# Altium PCB Arduino NANO V3_PCB_2022-06-21.pcbdoc
Units mil, origin at the board's own origin, x right, y up, seen from the top; angles counter-clockwise.
Board outline 3510 x 3525 mil, 2 copper layers (Top Layer, Bottom Layer); 31 components, 48 nets, 148 pads, 30 vias.
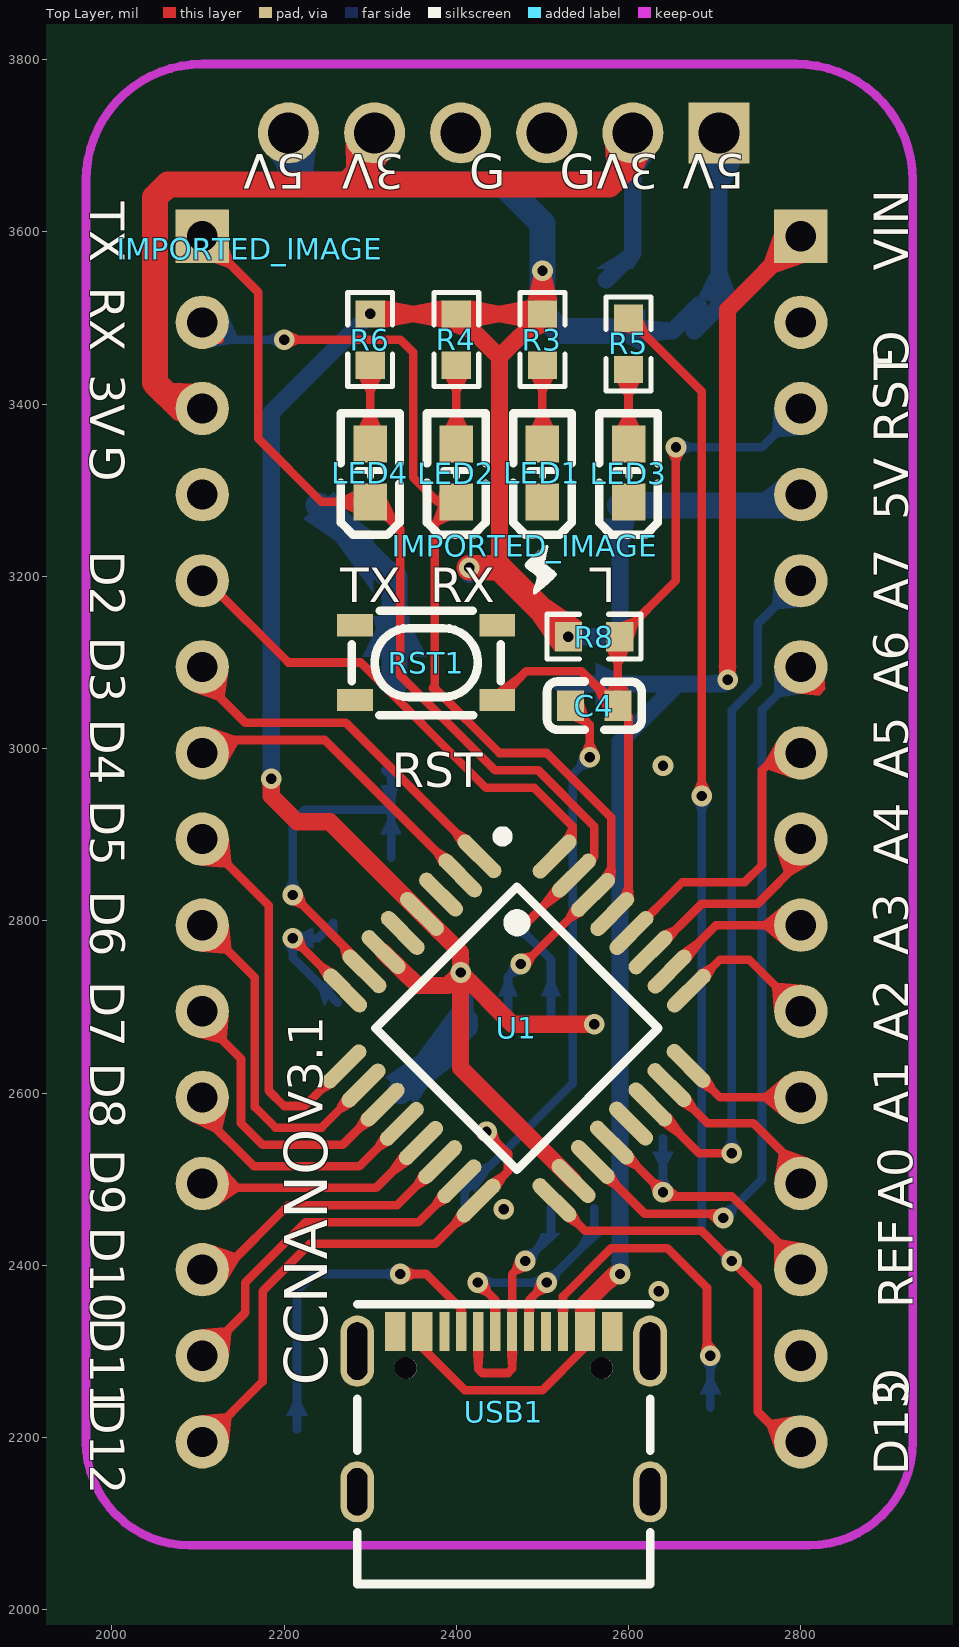
[diagram p0: Top Layer view]
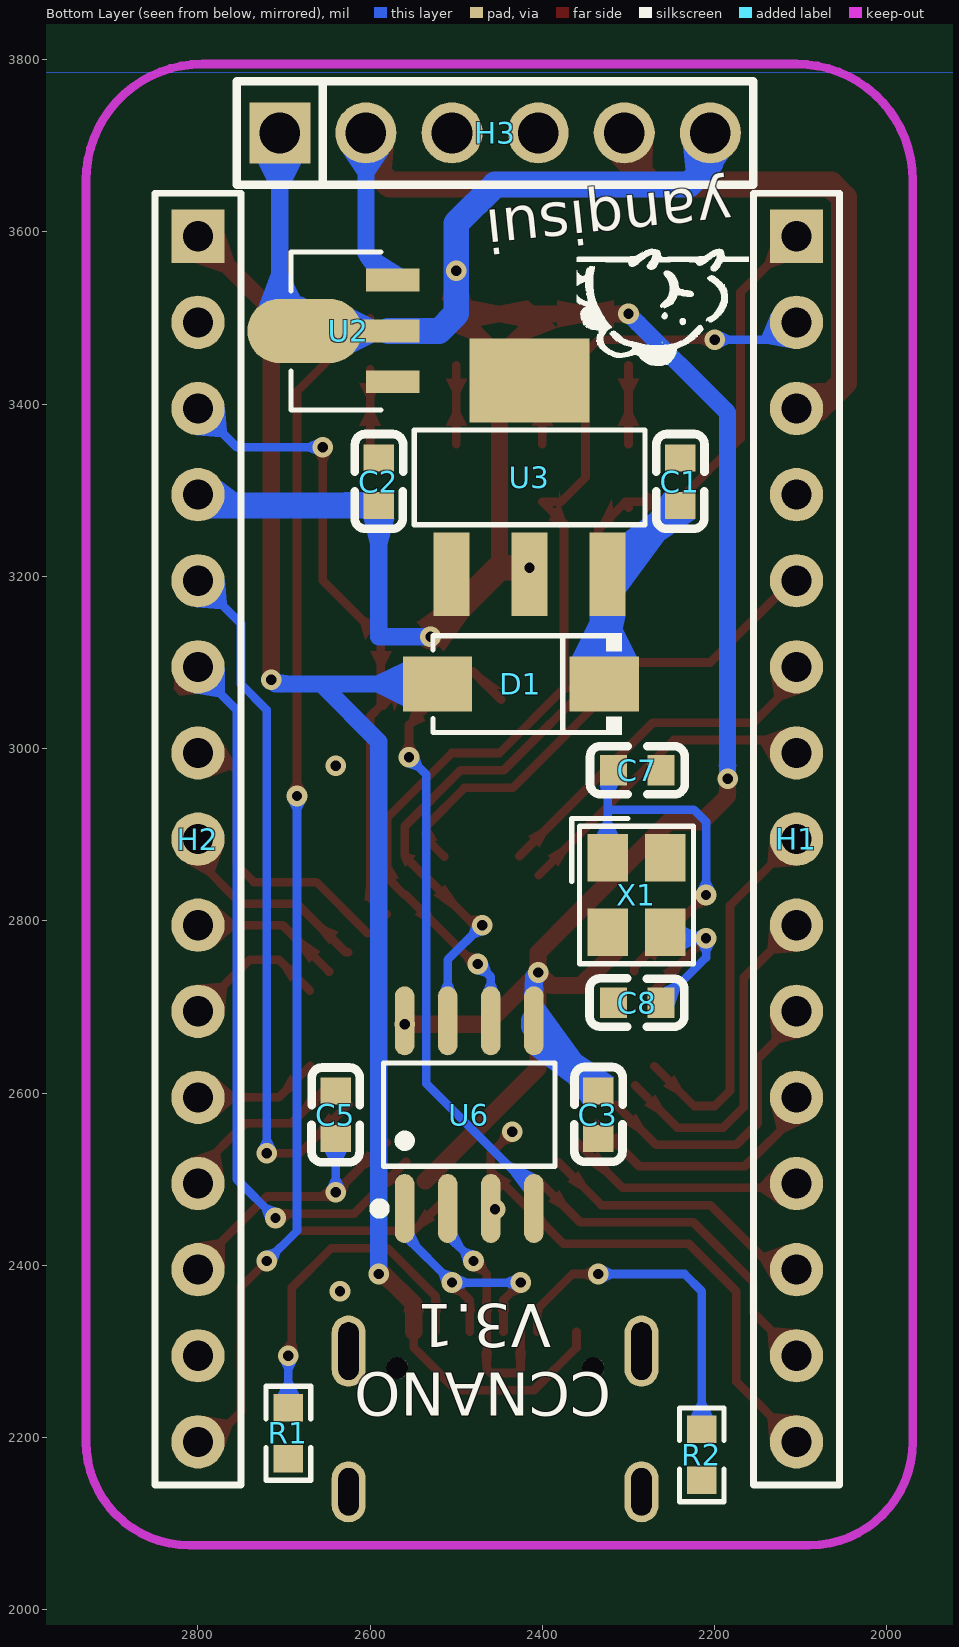
[diagram p1: Bottom Layer view, seen from below]

## Layer stack, top to bottom
Top Layer: signal copper (thickness not stored)
Dielectric: dielectric 12.6, FR-4, Dk 4.8
Bottom Layer: signal copper (thickness not stored)

## Board outline
4510,1000 1000,1000 1000,4525 4510,4525

## Components (designator, comment, footprint, x,y, rotation, side; value= is the part's Value field where it differs from the comment)
C1 "10uF" C0603#1 2240,3310 r90 bottom
C2 "22uF" C0603#1 2590,3310 r90 bottom
C3 "100nF" C0603#1 2335,2575 r90 bottom
C4 "100nF" C0603#2 2560,3050 r180 top
C5 "100nF" C0603#1 2640,2575 r270 bottom
C7 "22pF" C0603#1 2290,2975 r180 bottom
C8 "22pF" C0603#1 2290,2705 r0 bottom
D1 "SS36" SMA_L4.3-W2.6-LS5.2-RD 2425,3075 r180 bottom
H1 "Header-Male-2.54_1x15" HDR-TH_15P-P2.54-V 2105,2895 r90 bottom
H2 "Header-Male-2.54_1x15" HDR-TH_15P-P2.54-V 2800,2895 r90 bottom
H3 "Z-211-0611-0021-001" HDR-TH_6P-P2.54-V_Z-211-0611-0021-001 2455,3715 r0 bottom
IMPORTED_IMAGE "IMPORTED_IMAGE" IMPORTED_IMAGE 2479.64,3235.86 r0 top
IMPORTED_IMAGE "IMPORTED_IMAGE" IMPORTED_IMAGE 2160.33,3580.25 r0 top
LED1 "Power" LED0603-R-RD 2500,3320 r90 top
LED2 "RX" LED0603-R-RD 2400,3320 r90 top
LED3 "D13" LED0603-R-RD 2600,3320 r90 top
LED4 "TX" LED0603-R-RD 2300,3320 r90 top
R1 "5.1K" R0603#1 2695,2205 r270 bottom
R2 "5.1K" R0603#1 2215,2180 r270 bottom
R3 "1K" R0603#2 2500,3475 r90 top
R4 "1K" R0603#2 2400,3475 r90 top
R5 "1K" R0603#2 2600,3470 r90 top
R6 "1K" R0603#2 2300,3475 r90 top
R8 "1K" R0603#2 2560,3130 r180 top
RST1 "SKRPACE010" KEY-SMD_4P-L4.2-W3.2-P2.20-LS4.6 2365,3100 r0 top
U1 "ATMEGA328P-AU" TQFP-32_L7.0-W7.0-P0.80-LS9.0-BL 2470,2675 r225 top
U2 "HT7333-3" SOT-89-3_L4.5-W2.5-P1.50-LS4.2-BR 2625,3485 r0 bottom
U3 "AMS1117-5.0" SOT-223_L6.5-W3.5-P2.30-LS7.0-BR 2415,3315 r90 bottom
U6 "CH340N" SOP-8_L5.0-W4.0-P1.27-LS6.0-BL 2485,2575 r0 bottom
USB1 "TYPE-C16PIN" USB-C-SMD_TYPE-C16PIN 2455,2230 r0 top
X1 "16MHz" OSC-SMD_4P-L3.2-W2.5-BL 2290.8,2830 r90 bottom

## Footprints (in the part's own frame and the unit in brackets; to place one, negate y for a bottom-side part, rotate by r counter-clockwise, add the part's x,y. Pads: shape width x height; smd on the part's side, far side on the other; paste and mask are expansions set on the pad)
C0603#1 [mm]
  rect 0.8x0.9 smd: 1(0.7,0) 2(-0.7,0)
  silkscreen extent -1.39,-0.72 1.41,0.71
C0603#2 [mm]
  rect 0.8x0.9 smd: 1(-0.7,0) 2(0.7,0)
  silkscreen extent -1.41,-0.71 1.39,0.72
HDR-TH_6P-P2.54-V_Z-211-0611-0021-001 [mm]
  rect 1.8x1.8 hole 1.2: 1(6.35,0)
  round 1.8 hole 1.2: 2(3.81,0) 3(1.27,0) 4(-1.27,0) 5(-3.81,0) 6(-6.35,0)
  silkscreen extent -7.62,-1.52 7.62,1.52
HDR-TH_15P-P2.54-V [mil]
  rect 62x62 hole 35: 1(700,0)
  round 62 hole 35: 2(600,0) 3(500,0) 4(400,0) 5(300,0) 6(200,0) 7(100,0) 8(0,0) 9(-100,0) 10(-200,0) 11(-300,0) 12(-400,0) 13(-500,0) 14(-600,0) 15(-700,0)
  silkscreen extent -750,-50 750,50
IMPORTED_IMAGE [mil]
  silkscreen extent 0,-57 37,0
KEY-SMD_4P-L4.2-W3.2-P2.20-LS4.6 [mm]
  rect 1.05x0.65 smd: 1(-2.1,1.1) 2(2.1,1.1) 3(-2.1,-1.1) 4(2.1,-1.1)
  silkscreen extent -2.2,-1.55 2.2,1.52
LED0603-R-RD [mil]
  rect 43x39 smd: 1(33.5,0) 2(-33.5,0)
  silkscreen extent -72,-34 70,34
OSC-SMD_4P-L3.2-W2.5-BL [mm]
  rect 1.4x1.2 smd: 1(1.1,0.85) 2(-1.1,0.85) 3(-1.1,-0.85) 4(1.1,-0.85)
  silkscreen extent -2.03,-1.68 2.26,1.91
R0603#1 [mil]
  rect 31.75x34.02 smd: 1(29.66,0) 2(-29.66,0)
  silkscreen extent -55,-26 55,26
R0603#2 [mil]
  rect 31.75x34.02 smd: 1(-29.66,0) 2(29.66,0)
  silkscreen extent -55,-26 55,26
SMA_L4.3-W2.6-LS5.2-RD [mm]
  rect 2.046x1.62 smd: 1(2.46,0) 2(-2.46,0)
  silkscreen extent -2.6,-1.5 2.98,1.5
SOP-8_L5.0-W4.0-P1.27-LS6.0-BL [mil]
  oval 22.6x80.14 smd: 1(75,108.97) 2(25,108.97) 3(-25,108.97) 4(-75,108.97) 5(-75,-108.97) 6(-25,-108.97) 7(25,-108.97) 8(75,-108.97)
  silkscreen extent -99,-60 110,115
SOT-89-3_L4.5-W2.5-P1.50-LS4.2-BR [mm]
  rect 1.575x0.672 smd: 1(-1.302,1.5) 3(-1.302,-1.5)
  rect 1.833x0.672 smd: 2(-1.173,0)
  oval 3.372x1.898 smd: 2(1.302,0)
  silkscreen extent -0.95,-2.33 1.7,2.33
SOT-223_L6.5-W3.5-P2.30-LS7.0-BR [mm]
  rect 2.465x1.05 smd: 1(-2.857,2.3) 2(-2.857,0) 3(-2.857,-2.3)
  rect 2.465x3.54 smd: 4(2.857,0)
  silkscreen extent -1.4,-3.4 1.4,3.4
TQFP-32_L7.0-W7.0-P0.80-LS9.0-BL [mm]
  oval 0.45x1.65 smd: 1(-2.817,-4.369) 2(-2.017,-4.369) 3(-1.217,-4.369) 4(-0.417,-4.369) 5(0.381,-4.369) 6(1.181,-4.369) 7(1.981,-4.369) 8(2.781,-4.369) 17(2.791,4.369) 18(1.991,4.369) 19(1.191,4.369) 20(0.391,4.369) 21(-0.406,4.369) 22(-1.206,4.369) 23(-2.007,4.369) 24(-2.807,4.369)
  oval 1.65x0.45 smd: 9(4.382,-2.804) 10(4.382,-2.004) 11(4.382,-1.204) 12(4.382,-0.404) 13(4.382,0.394) 14(4.382,1.194) 15(4.382,1.994) 16(4.382,2.794) 25(-4.381,2.804) 26(-4.382,2.004) 27(-4.382,1.204) 28(-4.381,0.404) 29(-4.382,-0.394) 30(-4.381,-1.194) 31(-4.381,-1.994) 32(-4.381,-2.794)
  silkscreen extent -3.86,-4.45 2.94,2.95
USB-C-SMD_TYPE-C16PIN [mm]
  oval 1x2.1 hole 0.6 slot 1.7 at 90 deg: 1(-4.32,1.787) 2(4.32,1.787)
  oval 1x1.8 hole 0.6 slot 1.4 at 90 deg: 3(-4.32,-2.362) 4(4.32,-2.362)
  rect 0.6x1.15 smd: A1B12(-3.2,2.362) A4B9(-2.4,2.362) B1A12(3.2,2.362) B4A9(2.4,2.362)
  rect 0.3x1.15 smd: A5(-1.25,2.362) A6(-0.25,2.362) A7(0.25,2.362) A8(-1.75,2.362) B5(1.75,2.362) B6(0.75,2.362) B7(-0.75,2.362) B8(1.25,2.362)
  round 0.65 hole 0.65 unplated: ""(-2.89,1.288) ""(2.89,1.288)
  silkscreen extent -4.32,-5.08 4.32,3.17

## Via types
v1: diameter 24, hole 12, Top Layer to Bottom Layer, tented both sides, 30 vias

## Nets (pads, with @x,y where several pads share a name; then routed paths per layer and width w, separated by ;. In a path a pad name is that pad's centre, name@x,y a point inside that pad or via, vN(x,y) a via of type N, cw(c..) or ccw(c..) an arc to the next point about the centre after c; other vN are vias at no path point)
3.3V: H1.3 H3.2 H3.5 U2.3 | length 1144.5
  Top Layer w30: H1.3 2080,3395 2050,3425 2050,3640 2065,3655 2577.11,3655 2605,3682.89 H3.2 ; 2272.82,3655 2305,3687.18 H3.5
  Bottom Layer w20: U2.3@2573.8,3544.1 2605,3575.3 H3.2
+5V: C2.2 C3.1 H2.4 H3.1 H3.6 R3.2 R4.2 R6.2 R8.2 U1.4 U1.6 U1.18 U2.2 U3.2 U6.5 U6.8 | length 3859.6
  Top Layer w20: v1(2185,2965) 2185,2945 2215,2915 2253.2,2915 U1.4 2405,2763.2 v1(2405,2740) ; R6.2 R4.2 ; U1.6 2355,2725 2390,2725 v1(2405,2740) ; v1(2415,3210) 2450,3210 2450,3442.5 ; v1(2500,3555) R3.2 ; U1.18 2405,2629.1 v1(2405,2740) ; v1(2560,2680) 2465,2680 v1(2405,2740) ; R4.2 R3.2 ; R4.2 2450,3454.7 ; 2450,3442.5 2450,3454.7 ; 2450,3442.5 2450,3454.7 ; 2450,3454.7 R3.2
  Top Layer w30: v1(2415,3210) 2450,3210 v1(2530,3130) R8.2
  Bottom Layer w20: v1(2185,2965) 2185,3390 v1(2300,3505) ; v1(2405,2740) 2410,2735 U6.5 ; U3.2 v1(2415,3210) ; v1(2530,3130) 2590,3130 C2.2 ; U2.2@2578.8,3485 2651.3,3485 U2.2@2681.3,3515 ; U2.2@2676.3,3485 2705,3513.7 H3.1
  Bottom Layer w30: H3.6 2205,3680 2230,3655 2455,3655 2500,3610 v1(2500,3555) 2500,3505 2520,3485 U2.2@2578.8,3485 ; C3.1 2410,2677.6 U6.5 ; C2.2 2787.4,3282.4 H2.4
A0: H2.12 U1.23 | length 208.6
  Top Layer w10: U1.23 2691.7,2565 2745,2565 2800,2510 H2.12
A1: H2.11 U1.24 | length 145.3
  Top Layer w10: U1.24 2706.3,2595 H2.11
A2: H2.10 U1.25 | length 169.8
  Top Layer w10: U1.25 2706.1,2755 2740,2755 H2.10
A3: H2.9 U1.26 | length 174.5
  Top Layer w10: U1.26 2701.6,2795 H2.9
A4: H2.8 U1.27 | length 243.6
  Top Layer w10: U1.27 2628.5,2763.5 2685,2820 2750,2820 2800,2870 H2.8
A5: H2.7 U1.28 | length 347.9
  Top Layer w10: U1.28 2662.5,2845 2735,2845 2755,2865 2755,2975 2775,2995 H2.7
A6: H2.6 U1.19 | length 858.7
  Top Layer w10: U1.19 2618.7,2460 2710,2460 v1(2710,2455)
  Bottom Layer w10: v1(2710,2455) 2755,2500 2755,3045 2800,3090 H2.6
A7: H2.5 U1.22 | length 816.5
  Top Layer w10: U1.22 2682.2,2530 v1(2720,2530)
  Bottom Layer w10: v1(2720,2530) 2720,3045 2750,3075 2750,3145 H2.5
AREF: C5.1 H2.13 U1.20 | length 345.7
  Top Layer w10: U1.20 2582.5,2542.5 v1(2640,2485) 2645,2480 2720,2480 2800,2400 H2.13
  Bottom Layer w10: v1(2640,2485) C5.1
D0/RX: H1.2 LED2.2 U1.30 U6.6 | length 1280.5
  Top Layer w10: H1.2 H1.2@2125,3475 ; v1(2200,3475) 2335,3475 2350,3460 2350,3315 2378.5,3286.5 LED2.2 2375,3261.5 2375,3072.3 2372.7,3070 2375,3070 2450,2995 2505,2995 2580,2920 2580,2850 2560.2,2830.2 U1.30 2478.5,2750 v1(2475,2750)
  Bottom Layer w10: H1.2 2125,3475 v1(2200,3475) ; U6.6 2460,2735 v1(2475,2750)
D1/TX: H1.1 LED4.2 U1.31 U6.7 | length 1230.1
  Top Layer w10: H1.1 2170,3530 2170,3360 2243.5,3286.5 LED4.2 ; LED4.2@2300,3280 LED4.2 ; v1(2470,2795) 2479,2795 U1.31 2537.5,2852.5 2560,2875 2560,2910 2495,2975 2445,2975 2335,3085 2335,3255 2303.5,3286.5 LED4.2
  Bottom Layer w10: v1(2470,2795) 2510,2755 U6.7
D2: H1.5 U1.32 | length 591.9
  Top Layer w10: H1.5 2110,3195 2205,3100 2289,3100 2434.56,2954.44 2490.56,2954.44 2535,2910 2535,2895.6 U1.32
D3: H1.6 U1.1 | length 421.7
  Top Layer w10: H1.6 2105,3080 2155,3030 2271.8,3030 U1.1
D4: H1.7 U1.2 | length 380.8
  Top Layer w10: H1.7@2105,3005 H1.7 2120,3010 2247.3,3010 U1.2
D5: H1.8 U1.9 | length 438.4
  Top Layer w10: H1.8 2182.2,2817.8 2182.2,2602.8 2200,2585 2223.9,2585 U1.9
D6: H1.9 U1.10 | length 392.6
  Top Layer w10: H1.9 2166.1,2733.9 2166.1,2583.9 2190,2560 2243.4,2560 U1.10
D7: H1.10 U1.11 | length 342.8
  Top Layer w10: H1.10 2105,2685 2150,2640 2150,2565 2175,2540 2268,2540 U1.11
D8: H1.11 U1.12 | length 297.1
  Top Layer w10: H1.11 2105,2575 2165,2515 2287.5,2515 U1.12
D9: H1.12 U1.13 | length 277.6
  Top Layer w10: H1.12 2110,2490 2306.92,2490 U1.13
D10: H1.13 U1.14 | length 338
  Top Layer w10: H1.13@2105,2405 H1.13 2130,2395 2205,2470 2331.5,2470 U1.14
D11: H1.14 U1.15 | length 402.9
  Top Layer w10: H1.14 2155,2345 2155,2380 2225,2450 2356,2450 U1.15
D12: H1.15 U1.16 | length 636.9
  Top Layer w10: H1.15 2175,2265 2175,2370 2230,2425 2375.6,2425 U1.16 ; v1(2435,2555) 2460,2530 2460,2509.4 U1.16 ; 2450,2499.4 U1.16
D13: H2.15 R5.2 U1.17 | length 1631.7
  Top Layer w10: U1.17 2549.6,2440 2685,2440 2750,2375 2750,2230 2785,2195 H2.15 ; R5.2 2685,3414.7 v1(2685,2945)
  Bottom Layer w10: v1(2685,2945) 2685,2440 v1(2720,2405)
D+: U6.1 USB1.A6 USB1.B6 | length 319.6
  Top Layer w10: v1(2425,2380) 2445.2,2359.8 USB1.A6 ; USB1.B6 2484.5,2359.5 v1(2505,2380)
  Bottom Layer w10: v1(2425,2380) v1(2505,2380) 2560,2435 U6.1
D-: U6.2 USB1.A7 USB1.B7 | length 291.6
  Top Layer w10: USB1.B7 2425.5,2279.5 2430,2275 2460,2275 2464.8,2279.8 USB1.A7 2464.8,2389.8 v1(2480,2405)
  Bottom Layer w10: v1(2480,2405) 2510,2435 U6.2
GND: C1.1 C2.1 C3.2 C5.2 C7.1 C8.1 H1.4 H2.2 H2.14 H3.3 H3.4 LED1.2 LED3.2 R1.1 R2.1 RST1.1 U1.3 U1.5 U1.21 U2.1 U3.1 U6.3 USB1.A1B12 USB1.B1A12
  other v1: 2635,2370 2455,2465 2640,2980
LED2_1: LED2.1 R4.1 | length 91.8
  Top Layer w10: LED2.1 R4.1
LED4_1: LED4.1 R6.1 | length 91.8
  Top Layer w10: LED4.1 R6.1
R1_2: R1.2 USB1.B5 | length 392.6
  Top Layer w10: USB1.B5 2523.9,2363.9 2580,2420 2645,2420 2691.1,2373.9 v1@2691.1,2292
  Bottom Layer w10: R1.2 v1(2695,2295)
R2_2: R2.2 USB1.A5 | length 402.5
  Top Layer w10: v1(2335,2390) 2365,2390 2405.8,2349.2 USB1.A5
  Bottom Layer w10: R2.2 2215,2370 2235,2390 v1(2335,2390)
R3_1: LED1.1 R3.1 | length 91.8
  Top Layer w10: LED1.1 R3.1
R5_1: LED3.1 R5.1 | length 86.8
  Top Layer w10: LED3.1 R5.1
RESET: C4.1 H2.3 R8.1 RST1.4 U1.29 | length 916.9
  Top Layer w10: RST1.4 2481,3090 2545,3090 2585,3050 C4.1 ; U1.29 2600,2826.9 2600,3037.6 C4.1 ; v1(2655,3350) 2655,3195.3 R8.1 2587.6,3127.9 C4.1
  Bottom Layer w10: v1(2655,3350) 2755,3350 H2.3
S$1602: 
S$1609: 
S$1612: 
S$1615: 
S$1617: 
S$1621: 
S$1625: 
S$1629: 
U1_7: C7.2 U1.7 X1.1 | length 432.6
  Top Layer w10: v1(2210,2830) 2293.2,2746.8 U1.7
  Bottom Layer w10: v1(2210,2830) 2210,2915 2224.1,2929.1 2324.3,2929.1 ; C7.2 2324.3,2968.3 X1.1
U1_8: C8.2 U1.8 X1.3 | length 248.4
  Top Layer w10: v1(2210,2780) 2210.1,2780 U1.8
  Bottom Layer w10: X1.3 2257.3,2797.7 2239.6,2780 v1(2210,2780) 2210,2757.4 C8.2
U3_3: C1.2 D1.1 U3.3 | length 246.5
  Bottom Layer w30: C1.2 2319.9,3202.5 U3.3 2328.1,3198.8 D1.1
U6_4: C4.2 U6.4 | length 653.4
  Top Layer w10: C4.2 2555,3027.4 v1(2555,2990)
  Bottom Layer w10: U6.4 2410,2486.2 2535,2611.2 2535,2970 v1(2555,2990)
VBUS: D1.2 H2.1 USB1.A4B9 USB1.B4A9 | length 1846.6
  Top Layer w10: USB1.A4B9 2360.5,2304.5 2410,2255 2500,2255 2549.5,2304.5 USB1.B4A9
  Top Layer w20: USB1.B4A9 2549.5,2355.4 2584.1,2390 v1(2590,2390) ; v1(2715,3080) 2715,3510 H2.1
  Bottom Layer w20: D1.2 2710,3075 v1(2715,3080) ; v1(2590,2390) 2590,3008.06 2656.94,3075 2691.16,3075
pads on no net: RST1.2 RST1.3 U3.4 USB1. USB1.1 USB1.2 USB1.3 USB1.4 USB1.A8 USB1.B8 X1.2 X1.4

## Polygon pours and split planes (outlines as drawn)
GND on Top Layer (solid): 1530,3940 1570,3900 3895,3900 3715,3720 3715,1700 3685,1670 1660,1670 1545,1785 1545,3890
GND on Bottom Layer (solid): 1500,4025 1595,3975 1595,3930 1740,3785 4010,3785 3645,3420 3645,1650 3495,1500 1750,1500 1580,1670 1580,3850 1595,3865 1595,3930 1500,4025

## Keep-outs
Keep-Out Layer:
  lines w10 net S$1617: 2810,2075 ccw(c2810,2195) 2930,2195
  lines w10 net S$1621: 1970,2195 ccw(c2090,2195) 2090,2075
  lines w10 net S$1625: 1970,3660 cw(c2105,3660) 2105,3795
  lines w10 net S$1629: 2795,3795 cw(c2795,3660) 2930,3660

## Other copper
Top Layer:
  region net A6: 2793.06,3064.06 2825.94,3096.94 2828.38,3068.69 2821.31,3061.62
  region net LED4_1: 2287.5,3375 2312.5,3375 2305,3390 2295,3390
  region net LED4_1: 2287.5,3429.47 2312.5,3429.47 2305,3414.47 2295,3414.47
  region net LED2_1: 2387.5,3375 2412.5,3375 2405,3390 2395,3390
  region net LED2_1: 2387.5,3429.47 2412.5,3429.47 2405,3414.47 2395,3414.47
  region net R3_1: 2487.5,3375 2512.5,3375 2505,3390 2495,3390
  region net R3_1: 2487.5,3429.47 2512.5,3429.47 2505,3414.47 2495,3414.47
  region net +5V: 2382.99,3488.78 2382.99,3520.53 2352.99,3514.66 2352.99,3494.66
  region net +5V: 2317.01,3520.53 2317.01,3488.78 2347.01,3494.66 2347.01,3514.66
  region net +5V: 2482.99,3488.78 2482.99,3520.53 2452.99,3514.66 2452.99,3494.66
  region net +5V: 2417.01,3520.53 2417.01,3488.78 2447.01,3494.66 2447.01,3514.66
  region net +5V: 2417.01,3520.53 2382.99,3488.78 2413.91,3476.6 2428.54,3490.26
  region net +5V: 2517.01,3488.78 2482.99,3520.53 2471.46,3490.26 2486.09,3476.6
  region net RESET: 2575.06,3067.72 2600.06,3067.72 2592.56,3082.72 2582.56,3082.72
  region net RESET: 2575.06,3112.99 2600.06,3112.99 2592.56,3097.99 2582.56,3097.99
  region net VBUS: 2804.35,3564 2769,3599.35 2758.39,3567.53 2772.53,3553.39
  region net VBUS: 2706,3087.94 2724,3087.94 2725,3096.34 2705,3096.34
  region net D0/RX: 2380.5,3274 2380.5,3299 2378.5,3291.5 2378.5,3281.5
  region net D0/RX: 2207.94,3466 2207.94,3484 2216.34,3480 2216.34,3470
  region net +5V: 2482.99,3520.53 2517.01,3520.53 2510,3550.53 2490,3550.53
  region net D13: 2617.01,3498.46 2596.77,3483.78 2614.49,3478.1 2622.69,3484.05
  region net D13: 2676,2952.94 2694,2952.94 2690,2961.34 2680,2961.34
  region net R5_1: 2587.5,3375 2612.5,3375 2605,3390 2595,3390
  region net R5_1: 2587.5,3424.47 2612.5,3424.47 2605,3409.47 2595,3409.47
  region net RESET: 2571.81,3043.3 2577.16,3067.72 2564.06,3078.01 2561.52,3066.41
  region net RESET: 2447.99,3069.5 2468.3,3069.5 2482.56,3084.5 2468.42,3084.5
  region net +5V: 2514.47,3112.99 2546.22,3147.01 2508.58,3172.63 2488.1,3150.69
  region net +5V: 2422.94,3201 2422.94,3219 2431.34,3220 2431.34,3200
  region net D1/TX: 2526.03,2829.51 2513.5,2842.04 2499.36,2822.44 2506.44,2815.37
  region net D1/TX: 2480.74,2789.64 2473.97,2806.32 2483.1,2806.17 2487.18,2796.11
  region net D0/RX: 2548.29,2807.23 2535.78,2819.78 2527.88,2806.45 2534.95,2799.37
  region net D0/RX: 2486.72,2747.44 2476.07,2761.95 2485.18,2763.75 2491.16,2755.59
  region net A3: 2658.21,2764.15 2670.74,2751.62 2684.88,2771.21 2677.81,2778.28
  region net A3: 2779.5,2771.75 2779.5,2818.25 2757.8,2800 2757.8,2790
  region net A1: 2692.72,2621.08 2680.21,2608.54 2693.55,2600.67 2700.62,2607.75
  region net A1: 2779.5,2571.75 2779.5,2618.25 2757.8,2600 2757.8,2590
  region net AREF: 2640.75,2496.98 2628.02,2484.25 2624.91,2493.02 2631.98,2500.09
  region net AREF: 2603.15,2532.55 2591.72,2519.02 2605.65,2512.27 2612.13,2519.94
  region net +5V: 2396,2732.06 2414,2732.06 2415,2723.66 2395,2723.66
  region net D12: 2448.77,2485.67 2436.26,2498.22 2446.47,2502.94 2453.53,2495.86
  region net D12: 2448.77,2485.67 2436.26,2498.22 2449.61,2506.08 2456.67,2498.99
  region net D12: 2446.98,2555.75 2434.25,2543.02 2443.02,2539.91 2450.09,2546.98
  region net D8: 2326.34,2541.3 2313.82,2553.83 2305.93,2540.5 2313,2533.43
  region net D8: 2134.8,2586.46 2092.8,2566.5 2118.32,2554.6 2127.91,2559.16
  region net U1_8: 2260.5,2742.17 2248,2729.62 2240.09,2742.94 2247.15,2750.02
  region net U1_8: 2221.97,2780.8 2209.3,2768.02 2218.08,2764.95 2225.12,2772.05
  region net U1_7: 2284.15,2762.67 2268.89,2753.68 2264.45,2768.47 2273.35,2773.72
  region net U1_7: 2221.98,2830.75 2209.25,2818.02 2218.02,2814.91 2225.09,2821.98
  region net +5V: 2405.75,2728.02 2393.02,2740.75 2386.38,2735.52 2400.52,2721.38
  region net +5V: 2396,2747.94 2414,2747.94 2415,2756.34 2395,2756.34
  region net D0/RX: 2392.71,3265 2380.5,3286.82 2374.05,3267.62 2379.12,3258.55
  region net D0/RX: 2583.88,2844.22 2567,2849.6 2575,2862.8 2585,2859.61
  region net D1/TX: 2319.5,3289.81 2316.4,3265 2330,3252.93 2331.58,3265.49
  region net D1/TX: 2546.91,2875.45 2559.44,2862.92 2563.54,2871.46 2556.46,2878.54
  region net D2: 2539.41,2889.04 2522.37,2893.89 2530,2907.31 2540,2904.47
  region net D1/TX: 2280.5,3274 2280.5,3299 2265.5,3291.5 2265.5,3281.5
  region net D1/TX: 2136,3581.68 2118.32,3564 2134.23,3558.7 2141.3,3565.77
  region net 3.3V: 2623.6,3684.84 2572.75,3700.31 2574.69,3673.8 2607.22,3663.9
  region net 3.3V: 2093.8,3423.91 2077.72,3380.28 2059.69,3394.1 2071.11,3425.1
  region net 3.3V: 2321.45,3683.62 2271.81,3702.6 2272.42,3675.81 2303.11,3664.07
  region net D9: 2348.54,2519.09 2336.01,2531.62 2321.87,2512.02 2328.94,2504.95
  region net D9: 2128.11,2515.66 2122.61,2469.48 2146.31,2485 2147.5,2495
  region net D5: 2259.53,2608.13 2246.98,2620.64 2239.12,2607.3 2246.21,2600.24
  region net D5: 2103.06,2864.06 2135.94,2896.94 2138.38,2868.69 2131.31,2861.62
  region net D6: 2281.79,2585.84 2269.27,2598.38 2261.38,2585.05 2268.44,2577.97
  region net D6: 2103.06,2764.06 2135.94,2796.94 2138.38,2768.69 2131.31,2761.62
  region net D7: 2304.08,2563.58 2291.53,2576.09 2283.68,2562.74 2290.76,2555.68
  region net D7: 2135.83,2691.73 2097.9,2664.82 2125.28,2657.64 2133.56,2663.51
  region net A4: 2647.52,2773.08 2636.87,2787.24 2651.15,2793.22 2657.22,2785.14
  region net A4: 2814.72,2867.72 2771.09,2883.8 2780.23,2857.31 2790.57,2853.5
  region net A2: 2693.02,2729.36 2680.47,2741.87 2693.8,2749.76 2700.88,2742.7
  region net A2: 2769.06,2693.06 2801.94,2725.94 2773.69,2728.38 2766.62,2721.31
  region net A5: 2788.8,2966.09 2772.72,3009.72 2758.5,2985.57 2762.31,2975.23
  region net A0: 2670.45,2598.8 2657.92,2586.27 2671.25,2578.39 2678.33,2585.46
  region net A0: 2809.65,2524.46 2769.57,2500.9 2774.16,2528.77 2783.07,2534
  region net A7: 2648.18,2576.52 2635.65,2563.99 2655.25,2549.85 2662.32,2556.92
  region net D12: 2415.37,2452.27 2402.84,2464.8 2394.97,2451.46 2402.04,2444.39
  region net D12: 2103.06,2225.94 2135.94,2193.06 2138.38,2221.31 2131.31,2228.38
  region net D11: 2393.09,2474.55 2380.56,2487.08 2372.68,2473.75 2379.75,2466.68
  region net D11: 2103.06,2325.94 2135.94,2293.06 2138.38,2321.31 2131.31,2328.38
  region net D10: 2370.83,2496.83 2358.28,2509.34 2350.42,2496 2357.5,2488.93
  region net D10: 2132.28,2380.28 2116.2,2423.91 2142.69,2414.77 2146.5,2404.43
  region net +5V: 2176,2957.06 2194,2957.06 2195,2948.66 2175,2948.66
  region net AREF: 2650.31,2491.14 2644.8,2474 2653.95,2475 2657.16,2485
  region net AREF: 2804.53,2425.67 2769.01,2395.66 2768.93,2424 2776.59,2430.48
  region net RESET: 2606.48,2823.3 2588.97,2825.99 2595,2840.24 2605,2838.7
  region net RESET: 2591,3147.01 2605.53,3126.67 2611.24,3144.47 2605.35,3152.72
  region net RESET: 2646,3342.06 2664,3342.06 2660,3333.66 2650,3333.66
  region net D4: 2394.09,2875.73 2381.55,2863.21 2373.68,2876.55 2380.75,2883.62
  region net D4: 2132.43,2980.56 2115.9,3024.02 2142.55,3015 2146.35,3005
  region net D3: 2416.35,2898.02 2403.85,2885.47 2395.94,2898.79 2403,2905.87
  region net D3: 2135.43,3089.1 2095.35,3065.54 2121.93,3056 2130.84,3061.23
  region net D-: 2470.7,2300.4 2458.9,2300.4 2459.8,2285.4 2469.8,2285.4
  region net D-: 2431.4,2300.4 2419.6,2300.4 2420.47,2285.4 2430.47,2285.4
  region net D-: 2470.7,2300.4 2458.9,2300.4 2459.8,2285.4 2469.8,2285.4
  region net D-: 2431.4,2300.4 2419.6,2300.4 2420.47,2285.4 2430.47,2285.4
  region net U6_4: 2548.19,3053.99 2535.79,3032.28 2549.42,3025.91 2554.56,3034.91
  region net U6_4: 2546,2997.94 2564,2997.94 2560,3006.34 2550,3006.34
  region net +5V: 2416.98,2740.75 2404.25,2728.02 2409.48,2721.38 2423.62,2735.52
  region net +5V: 2552.06,2671 2552.06,2689 2543.66,2690 2543.66,2670
  region net A6: 2581.42,2509.77 2568.9,2497.24 2582.24,2489.37 2589.3,2496.44
  region net A6: 2705.2,2466 2699.69,2448.86 2692.84,2455 2696.05,2465
  region net D13: 2536.87,2465.24 2524.36,2452.7 2537.7,2444.83 2544.76,2451.91
  region net D13: 2794.1,2225.43 2770.54,2185.35 2761,2211.93 2766.23,2220.84
  region net VBUS: 2537.7,2345.6 2561.3,2345.6 2559.49,2355.39 2539.49,2355.39
  region net VBUS: 2587.67,2378.23 2578.61,2393.78 2570.68,2390.72 2581.09,2372.84
  region net R2_2: 2399.88,2345.65 2411.69,2345.65 2410.78,2349.22 2400.78,2349.22
  region net R2_2: 2342.94,2381 2342.94,2399 2351.34,2395 2351.34,2385
  region net R1_2: 2518,2345.6 2529.8,2345.6 2528.89,2360.6 2518.89,2360.6
  region net R1_2: 2701.84,2304.86 2684.36,2300.56 2686.1,2309.64 2696.1,2312.09
  region net D+: 2439.2,2345.6 2451.1,2345.6 2450.15,2359.85 2440.15,2359.85
  region net D+: 2436.98,2380.75 2424.25,2368.02 2433.02,2364.91 2440.09,2371.98
  region net D+: 2478.6,2345.6 2490.4,2345.6 2489.52,2359.52 2479.52,2359.52
  region net D+: 2505.75,2368.02 2493.02,2380.75 2489.91,2371.98 2496.98,2364.91
  region net D-: 2458.9,2345.6 2470.7,2345.6 2469.84,2360.6 2459.84,2360.6
  region net D-: 2480.75,2393.02 2468.02,2405.75 2464.91,2396.98 2471.98,2389.91
Bottom Layer:
  region net U1_7: 2201,2837.94 2219,2837.94 2215,2846.34 2205,2846.34
  region net U1_7: 2311.8,2957.3 2333.3,2957.3 2329.3,2942.3 2319.3,2942.3
  region net U1_7: 2311.8,2900.87 2336.8,2900.87 2329.3,2915.87 2319.3,2915.87
  region net U1_8: 2217.94,2771 2217.94,2789 2226.34,2785 2226.34,2775
  region net U1_8: 2233.71,2767.5 2233.71,2792.5 2218.71,2785 2218.71,2775
  region net U1_8: 2201,2772.06 2219,2772.06 2215,2763.66 2205,2763.66
  region net U1_8: 2246.7,2700.95 2259.02,2722.7 2245.41,2729.11 2240.29,2720.08
  region net A7: 2769.06,3196.94 2801.94,3164.06 2773.69,3161.62 2766.62,3168.69
  region net D0/RX: 2192.06,3466 2192.06,3484 2183.66,3480 2183.66,3470
  region net D0/RX: 2134.07,3505.76 2112.04,3464.81 2139.47,3470 2144.86,3480
  region net RESET: 2662.94,3341 2662.94,3359 2671.34,3355 2671.34,3345
  region net RESET: 2769.06,3396.94 2801.94,3364.06 2773.69,3361.62 2766.62,3368.69
  region net VBUS: 2710.2,3069 2704.69,3086.14 2696.23,3085 2702.66,3065
  region net VBUS: 2562.15,3050 2562.15,3100 2592.15,3085 2592.15,3065
  region net U3_3: 2345.1,3154 2303.8,3154 2313.14,3109 2343.14,3109
  region net U3_3: 2290.64,3106.9 2365.64,3106.9 2343.14,3151.9 2313.14,3151.9
  region net U3_3: 2303.8,3181.14 2303.8,3251 2258.8,3284.85 2258.8,3242.43
  region net U3_3: 2257.7,3298.2 2222.3,3266.7 2260.64,3240.58 2283.09,3260.56
  region net +5V: 2607.7,3266.7 2607.7,3298.2 2652.7,3297.44 2652.7,3267.44
  region net +5V: 2787.34,3266.7 2773.5,3311.09 2755.03,3297.44 2764.38,3267.44
  region net +5V: 2537.94,3121 2537.94,3139 2546.34,3140 2546.34,3120
  region net +5V: 2572.3,3266.7 2607.7,3266.7 2600,3236.7 2580,3236.7
  region net +5V: 2619.47,3460 2619.47,3510 2589.47,3495 2589.47,3475
  region net +5V: 2614.9,3471.8 2614.9,3498.2 2644.9,3495 2644.9,3475
  region net +5V: 2680,3522.35 2729.24,3513.66 2715,3552.35 2695,3552.35
  region net +5V: 2680,3679.6 2730,3679.6 2715,3649.6 2695,3649.6
  region net 3.3V: 2631.57,3691.56 2578.43,3691.56 2595,3666.76 2615,3666.76
  region net 3.3V: 2561.99,3557.3 2604.8,3557.3 2612.07,3568.24 2590.86,3575.31
  region net +5V: 2236.49,3698.76 2184.95,3685.78 2199.83,3663.95 2233.73,3672.49
  region net A7: 2711,2537.94 2729,2537.94 2725,2546.34 2715,2546.34
  region net D13: 2676,2937.06 2694,2937.06 2690,2928.66 2680,2928.66
  region net D13: 2720.75,2416.98 2708.02,2404.25 2704.91,2413.02 2711.98,2420.09
  region net R1_2: 2686,2287.06 2704,2287.06 2700,2278.66 2690,2278.66
  region net R1_2: 2707.5,2250.53 2682.5,2250.53 2690,2265.53 2700,2265.53
  region net AREF: 2627.5,2531.7 2652.5,2531.7 2645,2516.7 2635,2516.7
  region net AREF: 2631,2492.94 2649,2492.94 2645,2501.34 2635,2501.34
  region net +5V: 2300.75,3493.02 2288.02,3505.75 2281.38,3500.52 2295.52,3486.38
  region net +5V: 2176,2972.94 2194,2972.94 2195,2981.34 2175,2981.34
  region net D1/TX: 2481.98,2795.75 2469.25,2783.02 2478.02,2779.91 2485.09,2786.98
  region net D1/TX: 2521.3,2712.74 2498.7,2712.74 2505,2727.74 2515,2727.74
  region net D0/RX: 2475.75,2738.02 2463.02,2750.75 2459.91,2741.98 2466.98,2734.91
  region net D0/RX: 2471.3,2712.74 2448.7,2712.74 2455,2727.74 2465,2727.74
  region net +5V: 2412.56,2644.2 2398.7,2703.76 2353.7,2642.48 2353.7,2600.05
  region net +5V: 2317.3,2618.3 2352.7,2586.8 2378.09,2624.44 2355.64,2644.42
  region net +5V: 2398.86,2729.69 2416,2735.2 2420,2727.66 2400,2721.23
  region net +5V: 2421.3,2712.74 2398.7,2712.74 2400,2735 2420,2735
  region net A6: 2804.53,3064.33 2769.01,3094.34 2768.93,3066 2776.59,3059.52
  region net A6: 2721.98,2454.25 2709.25,2466.98 2718.02,2470.09 2725.09,2463.02
  region net VBUS: 2581,2397.94 2599,2397.94 2600,2406.34 2580,2406.34
  region net R2_2: 2327.06,2381 2327.06,2399 2318.66,2395 2318.66,2385
  region net R2_2: 2227.5,2225.53 2202.5,2225.53 2210,2240.53 2220,2240.53
  region net D+: 2516.98,2379.25 2504.25,2391.98 2513.02,2395.09 2520.09,2388.02
  region net D+: 2571.3,2437.11 2548.7,2437.42 2541.95,2424.02 2551.28,2419.21
  region net D+: 2432.94,2371 2432.94,2389 2441.34,2385 2441.34,2375
  region net D+: 2497.06,2371 2497.06,2389 2488.66,2385 2488.66,2375
  region net D-: 2491.98,2404.25 2479.25,2416.98 2488.02,2420.09 2495.09,2413.02
  region net D-: 2521.3,2437.06 2498.7,2437.42 2491.95,2424.02 2501.28,2419.21
  region net U6_4: 2407.53,2505.82 2421.3,2484.96 2436.3,2505.39 2436.3,2519.53
  region net U6_4: 2555.75,2978.02 2543.02,2990.75 2539.91,2981.98 2546.98,2974.91

## Silkscreen, mask and mechanical layers (free items; w line width, h text height)
Top Overlay:
  text "5V" at 2225,3690 h40 r180
  text "3V" at 2339.67,3690 h40 r180
  text "3V" at 2635,3690 h40 r180
  text "5V" at 2735,3690 h40 r180
  text "G" at 2415.16,3649.99 h40
  text "G" at 2520,3650 h40
  text "TX" at 1974.99,3635 h40 r270
  text "VIN" at 2925,3555 h40 r90
  text "RX" at 1974.99,3536.36 h40 r270
  text "G" at 2885,3485 h40 r270
  text "3V" at 1975,3435 h40 r270
  text "RST" at 2925,3355 h40 r90
  text "G" at 2015,3310 h40 r90
  text "5V" at 2925,3265 h40 r90
  text "D2" at 1975,3230 h40 r270
  text "L" at 2585,3210 h40 r180
  text "TX" at 2265,3170 h40
  text "RX" at 2370,3170 h40
  text "A7" at 2925,3160 h40 r90
  text "D3" at 1975,3130 h40 r270
  text "A6" at 2925,3065 h40 r90
  text "D4" at 1975,3035 h40 r270
  text "A5" at 2925,2965 h40 r90
  text "RST" at 2325,2955 h40
  text "D5" at 1975,2940 h40 r270
  text "A4" at 2925,2865 h40 r90
  text "D6" at 1975,2835 h40 r270
  text "A3" at 2925,2760 h40 r90
  text "D7" at 1975,2730 h40 r270
  text "A2" at 2925,2660 h40 r90
  text "D8" at 1975,2635 h40 r270
  text "V3.1" at 2245,2565 h40 r90
  text "A1" at 2925,2565 h40 r90
  text "D9" at 1975,2535 h40 r270
  text "A0" at 2930,2465 h40 r90
  text "D10" at 1975,2445 h40 r270
  text "REF" at 2930,2350 h40 r90
  text "D11" at 1975,2340 h40 r270
  text "G" at 2885,2280 h40 r270
  text "CCNANO" at 2250,2260 h50 r90
  text "D12" at 1975,2245 h40 r270
  text "D13" at 2925,2156 h40 r90
Bottom Overlay:
  text "yanqisui" at 2182.61,3654.86 h50 r174
  text "V3.1" at 2390,2355 h50 r180
  text "CCNANO" at 2320,2275 h50 r180